# Altium PCB IMX6WBED.PcbDoc (part 10 of 10)
Units mil, origin at the board's own origin, x right, y up, seen from the top; angles counter-clockwise.
Board outline 3318.23 x 4815.16 mil, 6 copper layers (Top Layer, L2_GND_1, L3_INT_1, L6_INT_2, L7_PWR_2, Bottom Layer), stack 27.7 mil thick; 504 components, 400 nets, 2357 pads, 1199 vias.
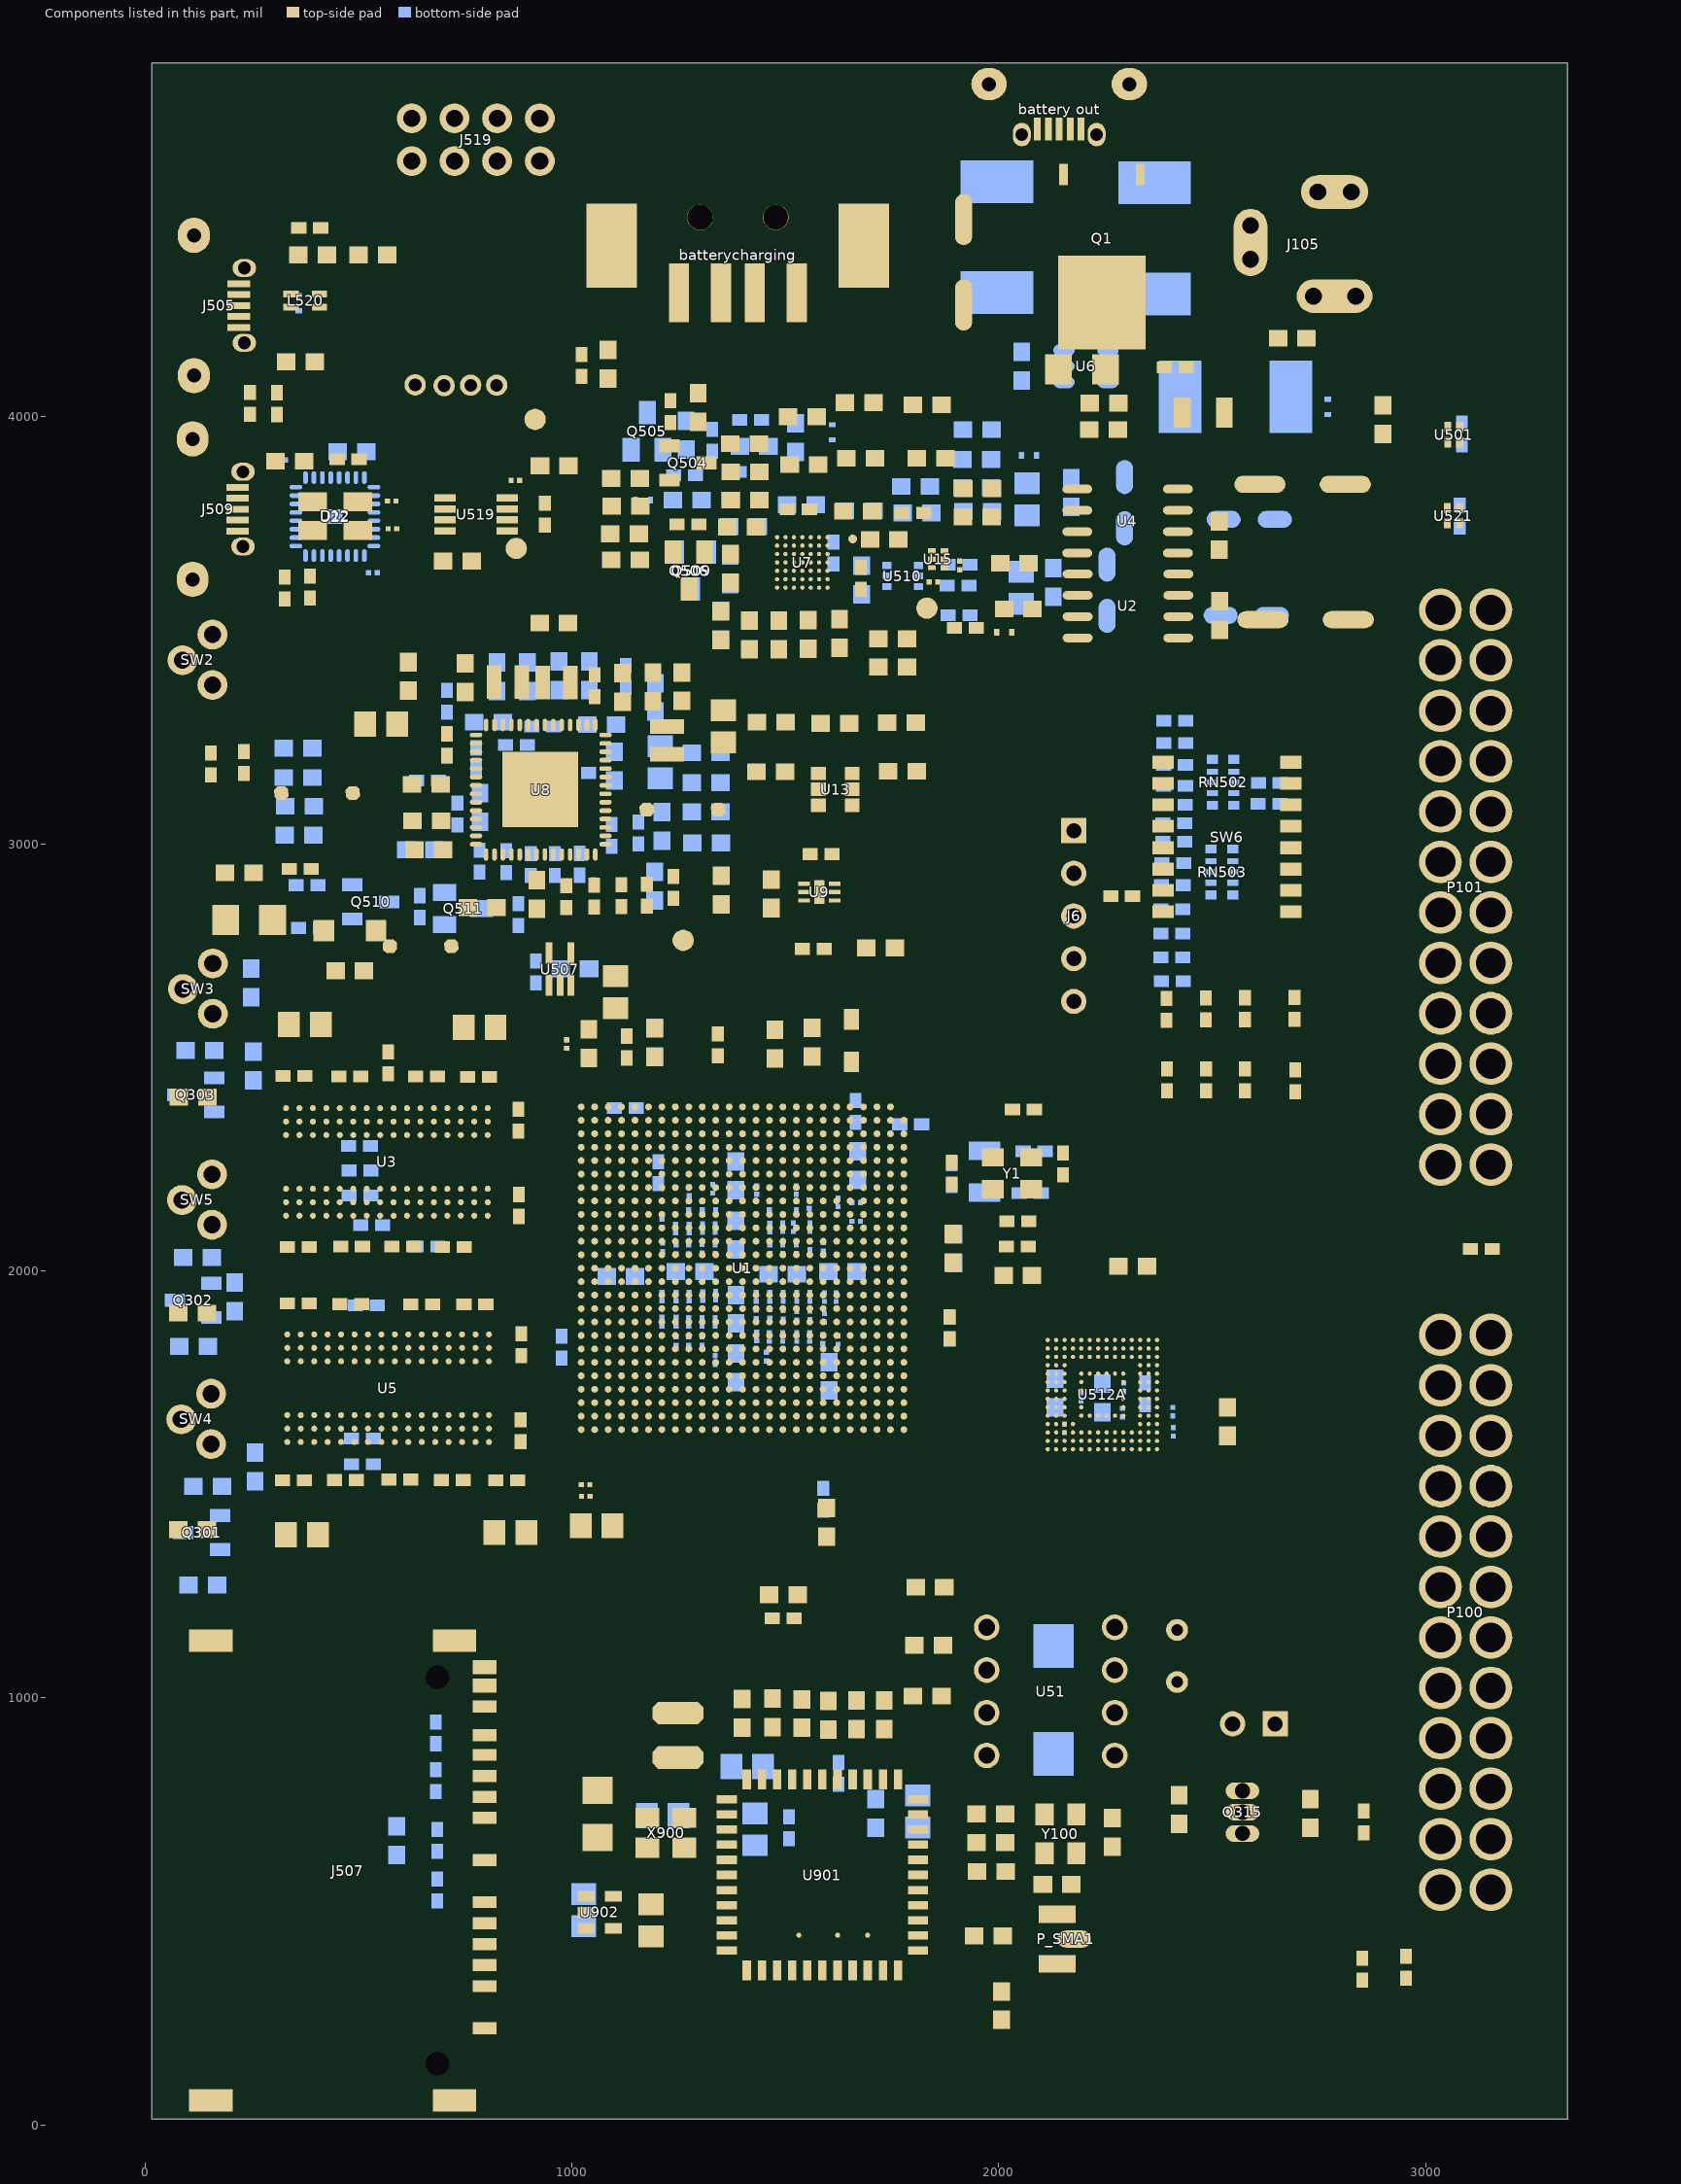
[diagram p14: the components of this part, seen from the top]

## Other copper (continued)
L7_PWR_2 (plane layer: these items are gaps in the copper):
  lines w10: 8.09,3277.5 5.21,3274.62 5.21,1208.49 1207.69,1208.49 ; 28.46,3391.23 823.16,3391.23 ; 516.98,3396.15 516.98,3501.28 889.04,3501.28 889.04,3868.98 ; 520.34,1438.07 444.48,1438.07 444.08,1437.67 444.08,1603.05 524.76,1603.05 524.76,2143.87 440.15,2143.87 440.15,2281.66 539.13,2281.66 539.13,2191.91 620.69,2191.91 ; 522.69,1438.53 522.93,1438.29 606.71,1438.29 606.71,2044.93 724.71,2044.93 724.71,2165.31 1137.11,2165.31 1137.11,2463.32 ; 620.96,2380.52 476.94,2380.52 476.94,3199.62 754.14,3199.62 754.14,3086.32 611.01,3086.32 611.01,2464.45 1137.11,2464.45 ; 622.31,2193.11 622.31,2380.52 ; 818.52,3390.13 818.52,3277.12 818.52,3039.03 691.87,3039.03 691.87,2964.05 822.91,2964.05 822.91,2662.7 1034.99,2662.7 ; 821.95,3390.33 1002.07,3390.33 1002.07,3807.06 ; 888.88,3866.81 888.88,4041.76 2451.59,4041.76 2451.59,3704.13 2451.42,3703.96 ; 1002.26,3805.32 1002.26,3959.97 2396.8,3959.97 2396.8,3806.7 1302.14,3806.7 1302.14,3445.88 ; 1032.12,2662.75 1143.27,2662.75 1143.27,2678.53 1143.02,2678.78 1143.02,3120.83 1074.14,3120.83 1074.14,3266.59 ; 1035.49,2465.42 1035.49,2660.1 ; 1075.76,3271.05 1221.35,3271.05 ; 1137.29,2204.92 1244.96,2204.92 ; 1204.64,1208.83 1239.89,1208.83 1242.37,1211.31 1242.37,1800.53 ; 1216.98,3084.31 1217.33,3083.96 1217.33,2829.48 1299.32,2829.48 ; 1219.04,3083.35 1245.65,3083.35 1245.65,3188.19 1221.26,3188.19 ; 1220.8,3189.25 1220.8,3270.91 ; 1244.5,1801.43 1306.58,1801.43 ; 1244.96,2203.71 1246.17,2203.71 1247.19,2204.73 1247.19,1942.73 1306.59,1942.73 1306.59,1784.37 1860.5,1784.37 1860.5,1936.04 ; 1247.4,2001.66 1302.86,2001.66 1302.86,2129.6 1250.9,2129.6 ; 1308.22,1851.35 1587.14,1851.35 1587.14,1936.74 ; 1333.46,3447.22 1302.13,3447.22 1302.13,3103.43 1302.32,3103.43 1302.32,3019.72 1302.51,3019.72 1302.51,2433.52 1412.69,2433.52 ; 1334.95,3447.38 1335.26,3447.69 1556.68,3447.69 1556.68,2595.05 2066.37,2595.05 2066.37,1936.8 2215.46,1936.8 2215.46,2242.33 2137,2242.33 2137,2675.64 1845.15,2675.64 1845.15,2594.8 ; 1369.08,3647.39 1369.08,3698.68 1370.3,3699.9 2399.92,3699.9 ; 1369.11,3651.3 1369.02,3651.21 1369.02,3568.01 1808.73,3568.01 1808.73,2594.36 ; 1398.77,2171.62 1593.71,2171.62 1593.71,2070.41 1719.35,2070.41 1719.35,2226.71 1592.98,2226.71 ; 1406.7,2226.53 1603.11,2226.53 ; 1406.83,2226.36 1334.88,2226.36 1334.88,2190.55 1397.67,2190.55 1397.67,1937.13 2066.37,1937.13 ; 1412.36,2227.98 1412.36,2433.17 1413.11,2433.92 ; 1520.74,2169.92 1520.74,2016.66 1909.92,2016.66 1909.96,2016.7 1972.83,2016.7 1972.83,2124.52 1721.61,2124.52 ; 1718.56,2224.8 1720.02,2226.26 ; 2400.53,3698.92 2400.53,2401.01 2558.12,2401.01 ; 2451.69,3707.78 2451.69,2479.58 2725.99,2479.58 2725.99,2316.26 2726.13,2316.26 2726.13,2245.57 2704.33,2245.57 ; 2557.83,2400.42 2557.83,2245.83 2703.59,2245.83 ; 3331.87,465.73 2939.14,465.73 2938.56,466.31 2938.56,4158.85 3335.82,4158.85

## Silkscreen, mask and mechanical layers (free items; w line width, h text height)
Top Overlay:
  lines w5: 721.47,3307.9 757.47,3307.9 770.47,3294.9 ; 1157.36,4101.59 1157.36,4148.14 ; 1158.08,4101.59 1183.86,4075.81 1183.86,3923.52 1209.77,3897.61 ; 1381.79,3425.52 1626.1,3425.52 1717.19,3334.43 1926.71,3334.43 ; 1636.47,2930.9 1659.47,2953.9 ; 1641,3395.71 1641,3408.13 ; 1642.3,3407.87 1644.15,3409.72 1656.68,3409.72 ; 1661.47,2953.89 1701.46,2953.89 ; 1926.27,3471.54 1926.27,3226.16 1952.71,3199.72
  lines w10: 582.47,3708.9 582.47,3722.9 ; 604.47,3809.9 620.47,3825.9 620.47,3836.9 ; 805.47,2773.9 830.47,2798.9 879.47,2798.9 887.47,2806.9 ; 866.47,2768.9 901.47,2768.9 933.47,2800.9 970.47,2800.9 977.47,2807.9 ; 1030.47,1514.9 1037.47,1521.9 1093.47,1521.9 ; 1051.47,2812.9 1063.47,2800.9 1076.47,2800.9 ; 1057.47,1469.9 1204.47,1469.9 ; 1117.47,2810.9 1117.47,2750.9 1132.47,2735.9
  text "Lightalk Technology Co., Ltd." at 2767.41,2438.4 h50 r270
Bottom Overlay:
  drawing of 212 lines, arcs and shapes, not listed
  text "Lightalk Technology Co., Ltd." at 2809.62,2434.7 h50 r90
Mechanical 5:
  drawing of 319 lines, arcs and shapes, not listed
  text "LAYER 1  TOP                1/2 to 1 oz." at 7461.92,3534.46 h125
  text "LAYER 1  TOP                1/2 to 1 oz." at 7461.92,3534.46 h125
  text "LAYER 2  GND PLANE          1 oz." at 7461.92,3234.46 h125
  text "LAYER 2  GND PLANE          1 oz." at 7461.92,3234.46 h125
  text "LAYER 3  INTERNAL 1         1/2 oz." at 7461.92,2934.46 h125
  text "LAYER 3  INTERNAL 1         1/2 oz." at 7461.92,2934.46 h125
  text "LAYER 6  INTERNAL 2         1/2 oz." at 7462.1,2633.72 h125
  text "LAYER 6  INTERNAL 2         1/2 oz." at 7462.1,2633.72 h125
  text "LAYER 7  GND PLANE          1 oz." at 7462.1,2333.72 h125
  text "LAYER 7  GND PLANE          1 oz." at 7462.1,2333.72 h125
  text "LAYER 8  SOLDER SIDE        1/2 to 1 oz." at 7462.1,2033.72 h125
  text "LAYER 8  SOLDER SIDE        1/2 to 1 oz." at 7462.1,2033.72 h125
  text "DETAIL A" at 7184.17,1610.97 h125
  text "LAYER STACKUP" at 6893.56,1327.04 h125

## Text inside footprints (layer, text, board x,y; h text height)
"battery out": Top Overlay "1" at 2207.47,4638.9 h31 r180; Top Overlay "5" at 2101.22,4632.06 h31 r180
J505: Top Overlay "1" at 254.47,4326.9 h30 r270; Top Overlay "5" at 261.31,4220.65 h30 r270
J507: Top Overlay "15" at 832.04,1136.29 h30 r270; Top Overlay "9" at 797.47,183.9 h30 r270; Top Overlay "1" at 844.47,306.9 h30 r180
J509: Top Overlay "5" at 258.31,3743.65 h30 r270; Top Overlay "1" at 251.47,3849.9 h30 r270
J519: Top Overlay "1" at 944.47,4788.9 h30 r180; Top Overlay "4" at 604.47,4788.9 h30 r180; Top Overlay "5" at 604.47,4538.9 h30 r180; Top Overlay "8" at 954.47,4538.9 h30 r180
P100: Top Overlay "24" at 3224.47,569.9 h30 r270; Top Overlay "22" at 3224.47,689.9 h30 r270; Top Overlay "20" at 3224.47,809.9 h30 r270; Top Overlay "18" at 3224.47,919.9 h30 r270; Top Overlay "16" at 3224.47,1049.9 h30 r270; Top Overlay "14" at 3224.47,1169.9 h30 r270; Top Overlay "12" at 3224.47,1279.9 h30 r270; Top Overlay "10" at 3224.47,1399.9 h30 r270; Top Overlay "8" at 3224.47,1489.9 h30 r270; Top Overlay "6" at 3224.47,1619.9 h30 r270; Top Overlay "4" at 3224.47,1739.9 h30 r270; Top Overlay "2" at 3224.47,1859.9 h30 r270; Top Overlay "23" at 2924.47,569.9 h30 r270; Top Overlay "21" at 2924.47,689.9 h30 r270; Top Overlay "19" at 2924.47,809.9 h30 r270; Top Overlay "17" at 2924.47,929.9 h30 r270; Top Overlay "15" at 2924.47,1049.9 h30 r270; Top Overlay "13" at 2924.47,1159.9 h30 r270; Top Overlay "11" at 2924.47,1279.9 h30 r270; Top Overlay "9" at 2924.47,1389.9 h30 r270; Top Overlay "7" at 2924.47,1499.9 h30 r270; Top Overlay "5" at 2924.47,1619.9 h30 r270; Top Overlay "3" at 2924.47,1739.9 h30 r270; Top Overlay "1" at 2924.47,1859.9 h30 r270
P101: Top Overlay "24" at 3224.47,2267.9 h30 r270; Top Overlay "22" at 3224.47,2387.9 h30 r270; Top Overlay "20" at 3224.47,2507.9 h30 r270; Top Overlay "18" at 3224.47,2617.9 h30 r270; Top Overlay "16" at 3224.47,2747.9 h30 r270; Top Overlay "14" at 3224.47,2867.9 h30 r270; Top Overlay "12" at 3224.47,2977.9 h30 r270; Top Overlay "10" at 3224.47,3097.9 h30 r270; Top Overlay "8" at 3224.47,3187.9 h30 r270; Top Overlay "6" at 3224.47,3317.9 h30 r270; Top Overlay "4" at 3224.47,3437.9 h30 r270; Top Overlay "2" at 3224.47,3557.9 h30 r270; Top Overlay "23" at 2924.47,2267.9 h30 r270; Top Overlay "21" at 2924.47,2387.9 h30 r270; Top Overlay "19" at 2924.47,2507.9 h30 r270; Top Overlay "17" at 2924.47,2627.9 h30 r270; Top Overlay "15" at 2924.47,2747.9 h30 r270; Top Overlay "13" at 2924.47,2857.9 h30 r270; Top Overlay "11" at 2924.47,2977.9 h30 r270; Top Overlay "9" at 2924.47,3087.9 h30 r270; Top Overlay "7" at 2924.47,3197.9 h30 r270; Top Overlay "5" at 2924.47,3317.9 h30 r270; Top Overlay "3" at 2924.47,3437.9 h30 r270; Top Overlay "1" at 2924.47,3557.9 h30 r270
Q315: Top Overlay "3" at 2496.47,661.9 h30 r180; Top Overlay "1" at 2496.47,813.9 h30 r180
SW6: Top Overlay "1" at 2343.14,3178.4 h35 r90; Top Overlay "16" at 2753.14,3181.9 h35 r90; Top Overlay "8" at 2340.14,2813.4 h35 r90; Top Overlay "9" at 2731.14,2743.4 h35 r90; Top Overlay "ON" at 2665.14,3276.9 h35 r90
U507: Top Overlay "1" at 946.47,2628.9 h35 r90